# EAGLE board BB_SensorCape (EAGLE 7.2.0)
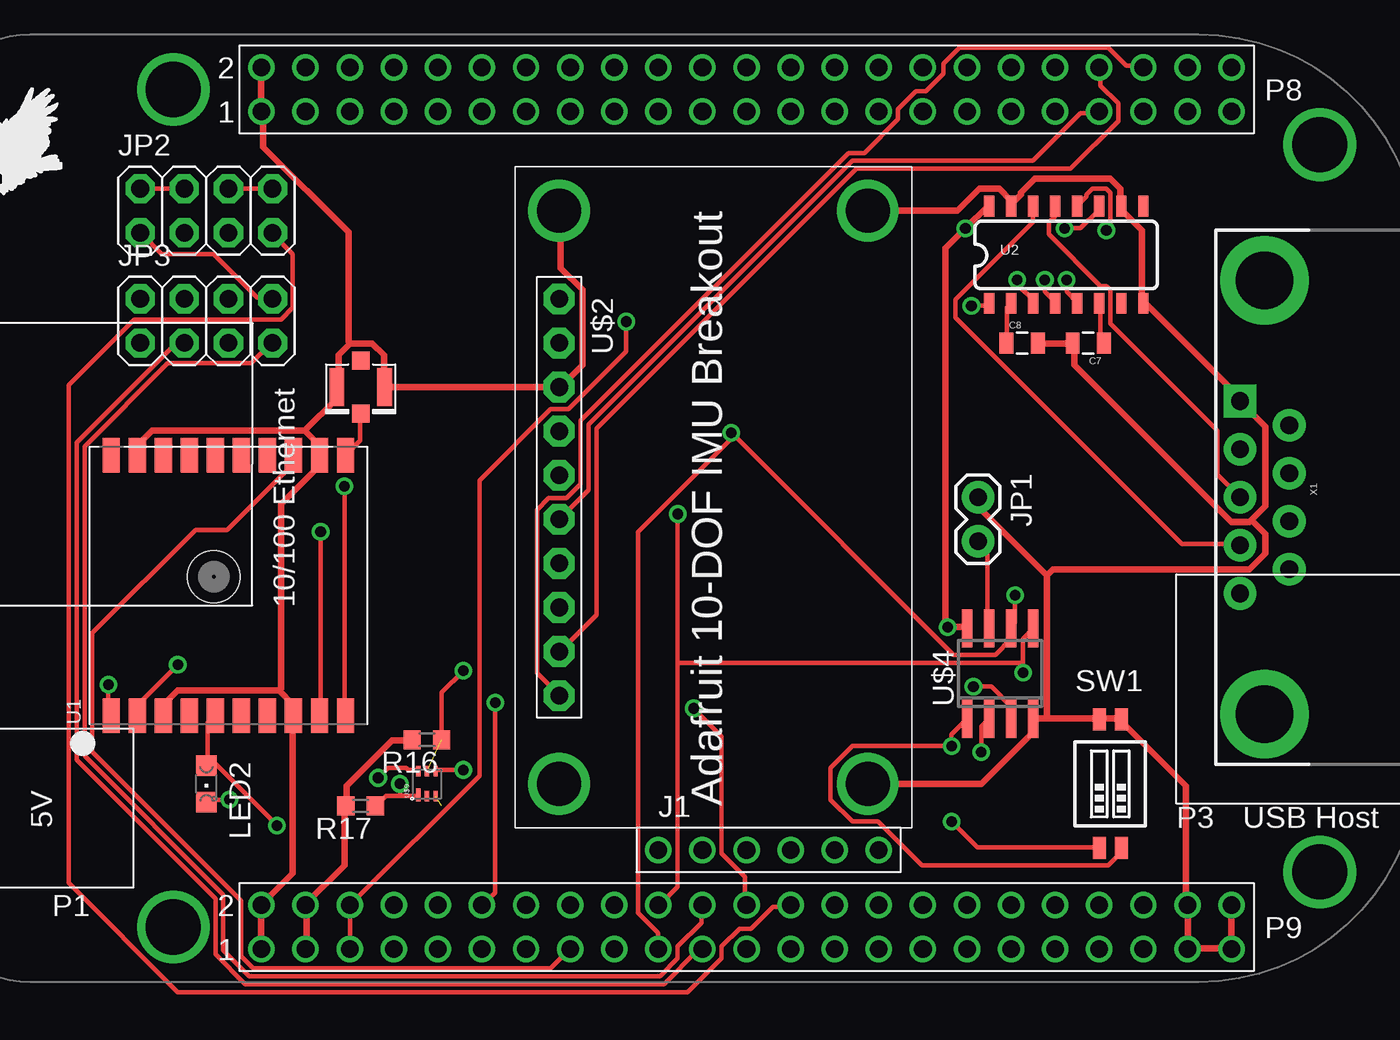
[diagram p0: board, top side]
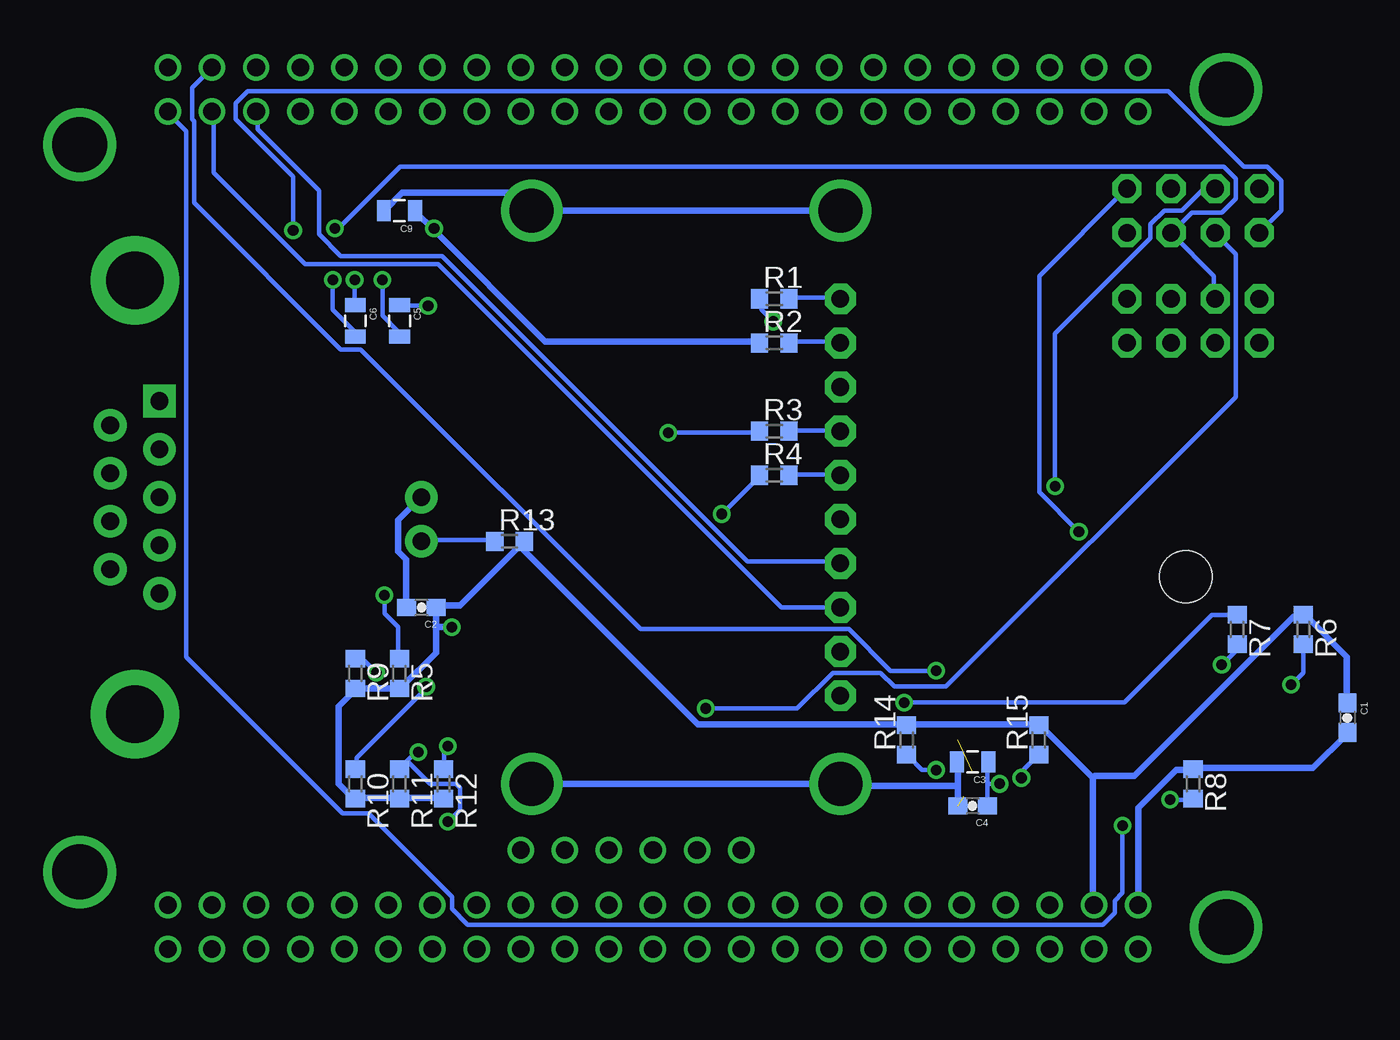
[diagram p1: board, bottom side, seen from below]

No outline drawn. Coordinates in mm, seen from the top.
Copper layers (1*16): Top 0.035mm / dielectric 1.5mm / Bottom 0.035mm
Design rules "default": minimum track width 10mil, minimum drill 24mil, track to track 8mil, track to pad 8mil, pad to pad 8mil, via to via 8mil, smd to smd 8mil, copper to edge 40mil, drill to drill 8mil, minimum pad ring 10mil, minimum via ring 8mil, stop-mask expansion 4mil, vias tented up to drill 0mil, thermal gap 10mil
Net classes: 1 power: width 0.381 mm

## Footprints (pad centres in the part's own frame; a part is rotated, then mirrored left to right if it is on the bottom)
0603-CAP = smd 1.1 x 1: 1 -0.85,0; 2 0.85,0
0805 = smd 0.8 x 1.2: 1 -0.9,0; 2 0.9,0
1X02 = drill 1.016 pad 1.88: 1 0,0; 2 2.54,0
2X04 = drill 1.016 pad 1.676 octagon: 1 -3.81,-1.27; 2 -3.81,1.27; 3 -1.27,-1.27; 4 -1.27,1.27; 5 1.27,-1.27; 6 1.27,1.27; 7 3.81,-1.27; 8 3.81,1.27
CHIPLED_0805 = smd 1.2 x 1.2: A 0,-1.05; C 0,1.05
BEAGLEBONE_BLACK = drill 3.175: H1 14.605,3.175; H2 80.645,6.35; H3 80.645,48.26; H4 14.605,51.435 | drill 1.016: J1.1 42.545,7.62; J1.2 45.085,7.62; J1.3 47.625,7.62; J1.4 50.165,7.62; J1.5 52.705,7.62; J1.6 55.245,7.62; P8.1 19.685,50.165; P8.2 19.685,52.705; P8.3 22.225,50.165; P8.4 22.225,52.705; P8.5 24.765,50.165; P8.6 24.765,52.705; P8.7 27.305,50.165; P8.8 27.305,52.705; P8.9 29.845,50.165; P8.10 29.845,52.705; P8.11 32.385,50.165; P8.12 32.385,52.705; P8.13 34.925,50.165; P8.14 34.925,52.705; P8.15 37.465,50.165; P8.16 37.465,52.705; P8.17 40.005,50.165; P8.18 40.005,52.705; P8.19 42.545,50.165; P8.20 42.545,52.705; P8.21 45.085,50.165; P8.22 45.085,52.705; P8.23 47.625,50.165; P8.24 47.625,52.705; P8.25 50.165,50.165; P8.26 50.165,52.705; P8.27 52.705,50.165; P8.28 52.705,52.705; P8.29 55.245,50.165; P8.30 55.245,52.705; P8.31 57.785,50.165; P8.32 57.785,52.705; P8.33 60.325,50.165; P8.34 60.325,52.705; P8.35 62.865,50.165; P8.36 62.865,52.705; P8.37 65.405,50.165; P8.38 65.405,52.705; P8.39 67.945,50.165; P8.40 67.945,52.705; P8.41 70.485,50.165; P8.42 70.485,52.705; P8.43 73.025,50.165; P8.44 73.025,52.705; P8.45 75.565,50.165; P8.46 75.565,52.705; P9.1 19.685,1.905; P9.2 19.685,4.445; P9.3 22.225,1.905; P9.4 22.225,4.445; P9.5 24.765,1.905; P9.6 24.765,4.445; P9.7 27.305,1.905; P9.8 27.305,4.445; P9.9 29.845,1.905; P9.10 29.845,4.445; P9.11 32.385,1.905; P9.12 32.385,4.445; P9.13 34.925,1.905; P9.14 34.925,4.445; P9.15 37.465,1.905; P9.16 37.465,4.445; P9.17 40.005,1.905; P9.18 40.005,4.445; P9.19 42.545,1.905; P9.20 42.545,4.445; P9.21 45.085,1.905; P9.22 45.085,4.445; P9.23 47.625,1.905; P9.24 47.625,4.445; P9.25 50.165,1.905; P9.26 50.165,4.445; P9.27 52.705,1.905; P9.28 52.705,4.445; P9.29 55.245,1.905; P9.30 55.245,4.445; P9.31 57.785,1.905; P9.32 57.785,4.445; P9.33 60.325,1.905; P9.34 60.325,4.445; P9.35 62.865,1.905; P9.36 62.865,4.445; P9.37 65.405,1.905; P9.38 65.405,4.445; P9.39 67.945,1.905; P9.40 67.945,4.445; P9.41 70.485,1.905; P9.42 70.485,4.445; P9.43 73.025,1.905; P9.44 73.025,4.445; P9.45 75.565,1.905; P9.46 75.565,4.445
R0603 = smd 1 x 1.1: 1 -0.85,0; 2 0.85,0
DIPSWITCH-02-50MIL = smd 0.762 x 1.27: 1 -0.635,-3.7; 2 0.635,-3.7; 3 0.635,3.7; 4 -0.635,3.7
FGPMMOPA6H = smd 2 x 1: P$1 -7.5,6.75; P$2 -7.5,5.25; P$3 -7.5,3.75; P$4 -7.5,2.25; P$5 -7.5,0.75; P$6 -7.5,-0.75; P$7 -7.5,-2.25; P$8 -7.5,-3.75; P$9 -7.5,-5.25; P$10 -7.5,-6.75; P$11 7.5,-6.75; P$12 7.5,-5.25; P$13 7.5,-3.75; P$14 7.5,-2.25; P$15 7.5,-0.75; P$16 7.5,0.75; P$17 7.5,2.25; P$18 7.5,3.75; P$19 7.5,5.25; P$20 7.5,6.75 | hole 3: 0.5,0.85
SO016 = smd 0.6 x 1.2: 1 -4.445,-2.8; 2 -3.175,-2.8; 3 -1.905,-2.8; 4 -0.635,-2.8; 5 0.635,-2.8; 6 1.905,-2.8; 7 3.175,-2.8; 8 4.445,-2.8; 9 4.445,2.8; 10 3.175,2.8; 11 1.905,2.8; 12 0.635,2.8; 13 -0.635,2.8; 14 -1.905,2.8; 15 -3.175,2.8; 16 -4.445,2.8
1X10-BIG = drill 1.016 pad 1.778 octagon: 1 -11.43,0; 2 -8.89,0; 3 -6.35,0; 4 -3.81,0; 5 -1.27,0; 6 1.27,0; 7 3.81,0; 8 6.35,0; 9 8.89,0; 10 11.43,0
SO08 = smd 0.6 x 2.2: 1 -1.905,-2.6; 2 -0.635,-2.6; 3 0.635,-2.6; 4 1.905,-2.6; 5 1.905,2.6; 6 0.635,2.6; 7 -0.635,2.6; 8 -1.905,2.6
ODFN-LD-6 = smd 0.75 x 0.25: 1 -0.645,0.5 | smd 0.6 x 0.25: 2 -0.72,0; 3 -0.72,-0.5; 4 0.72,-0.5; 5 0.72,0; 6 0.72,0.5
U.FL = smd 2.2 x 0.85: P$1 0,1.375; P$2 0,-1.375 | smd 1.05 x 1: P$3 1.525,0; P$4 -1.525,0
DB9_MALE = drill 1.016 pad 1.88: 1 5.54,-1.42; 2 2.77,-1.42; 3 0,-1.42; 4 -2.77,-1.42; 6 4.15,1.42; 7 1.38,1.42; 8 -1.38,1.42; 9 -4.15,1.42 | drill 1.016 pad 1.88 square: 5 -5.54,-1.42 | drill 3.302 pad 5.08: G1 -12.5,0; G2 12.5,0

## Placement (x,y rotation side)
C1  0.1uF  [0603-CAP]  7.62,15.24 270 bottom
C2  0.1uF  [0603-CAP]  60.96,21.59 180 bottom
C3  1uF  [0805]  29.21,12.7 180 bottom
C4  0.1uF  [0603-CAP]  29.21,10.16 180 bottom
C5  0.1 uF  [0805]  62.23,38.1 270 bottom
C6  0.1 uF  [0805]  64.77,38.1 270 bottom
C7  0.1 uF  [0805]  67.31,36.83 180 top
C8  0.1 uF  [0805]  63.5,36.83 0 top
C9  0.1 uF  [0805]  62.23,44.45 180 bottom
JP1  M02PTH  [1X02]  60.96,27.94 270 top
JP2  [2X04]  16.51,44.45 0 top
JP3  [2X04]  16.51,38.1 0 top
LED2  [CHIPLED_0805]  16.51,11.43 180 top
PCB1  BEAGLEBONE_BLACK  [BEAGLEBONE_BLACK]  0,0 0 top
R1  0  [R0603]  40.64,39.37 0 bottom
R2  0  [R0603]  40.64,36.83 0 bottom
R3  0  [R0603]  40.64,31.75 0 bottom
R4  0  [R0603]  40.64,29.21 0 bottom
R5  5.6K  [R0603]  62.23,17.78 270 bottom
R6  0  [R0603]  10.16,20.32 270 bottom
R7  0  [R0603]  13.97,20.32 270 bottom
R8  1K  [R0603]  16.51,11.43 270 bottom
R9  5.6K  [R0603]  64.77,17.78 270 bottom
R10  4.75K  [R0603]  64.77,11.43 270 bottom
R11  4.75K  [R0603]  62.23,11.43 270 bottom
R12  4.75K  [R0603]  59.69,11.43 270 bottom
R13  10K  [R0603]  55.88,25.4 0 bottom
R14  5.6K  [R0603]  33.02,13.97 90 bottom
R15  5.6K  [R0603]  25.4,13.97 90 bottom
R16  10K  [R0603]  29.21,13.97 180 top
R17  100  [R0603]  25.4,10.16 180 top
SW1  [DIPSWITCH-02-50MIL]  68.58,11.43 0 top
U1  FGPMMOPA6H  [FGPMMOPA6H]  17.78,22.86 90 top
U2  MAX232SOIC16  [SO016]  66.04,41.91 0 top
U$2  PINHD-1X10  [1X10-BIG]  36.83,27.94 270 top
U$4  CAT24C256W  [SO08]  62.23,17.78 0 top
U$9  ISL29125  [ODFN-LD-6]  29.21,11.43 90 top
U$20  U.FL  [U.FL]  25.4,34.29 270 top
X1  [DB9_MALE]  77.47,27.94 270 top

## Library data of the parts
C1 C2 C4 = SparkFun-Capacitors; PROD_ID: CAP-08604
C3 C5-C9 = SparkFun-Capacitors
JP1 X1 = SparkFun-Connectors
JP2 JP3 LED2 U$2 = adafruit
PCB1 = e14_BeagleBoneBlack_RevA
R1-R17 = resistor
SW1 = SparkFun-Electromechanical
U1 U$20 = microbuilder
U2 = SparkFun-DigitalIC
U$4 = vttay03_custom
U$9 = SparkFun-Sensors

## Nets
1PPS: PCB1.P9.15 U1.P$13
3.3V [power]: C1.1 C2.1 C9.1 PCB1.P9.3 PCB1.P9.4 R2.1 R5.2 R6.1 R9.2 R10.2 R11.2 R12.2 R13.2 R14.2 R15.2 R16.2 R17.2 U2.16 U$4.8
5V: PCB1.P9.5 PCB1.P9.6 R1.1
BB_GPS_RX: JP2.7 PCB1.P9.26
BB_GPS_TX: JP2.3 PCB1.P9.24
DBG_RX: JP3.7 PCB1.P9.22
DBG_TX: JP3.3 PCB1.P9.21
GND [power]: C1.2 C2.2 C3.2 C4.2 C7.2 C8.2 C9.2 JP1.1 PCB1.P8.1 PCB1.P8.2 PCB1.P9.1 PCB1.P9.2 PCB1.P9.43 PCB1.P9.44 PCB1.P9.45 PCB1.P9.46 R8.1 SW1.3 SW1.4 U1.P$3 U1.P$8 U1.P$12 U1.P$19 U2.8 U2.10 U2.15 U$2.3 U$4.4 U$9.3 U$20.P$1 U$20.P$2 X1.5
GPS_FIX: LED2.A PCB1.P8.45 U1.P$5
GPS_NRESET: PCB1.P9.12 R7.1
GPS_RX: JP2.2 JP2.4 U1.P$10
GPS_TX: JP2.6 JP2.8 U1.P$9
GYR_INT: PCB1.P8.39 U$2.6
GYR_RDY: PCB1.P8.41 U$2.7
I2C2_SCL: PCB1.P9.19 R3.1 R5.1 U$4.6
I2C2_SDA: PCB1.P9.20 R4.1 R9.1 U$4.5
ISL29125_INT: PCB1.P8.44 R16.1 U$9.5
LSM_DRDY: PCB1.P8.42 U$2.10
LSM_INT1: PCB1.P8.43 U$2.8
LSM_INT2: PCB1.P8.40 U$2.9
N$1: R1.2 U$2.1
N$2: R2.2 U$2.2
N$3: R4.2 U$2.5
N$4: R3.2 U$2.4
N$5: LED2.C R8.2
N$6: R6.2 U1.P$1
N$7: U1.P$11 U$20.P$3
N$8: R7.2 U1.P$2
N$9: R12.1 SW1.2 U$4.1
N$10: C7.1 U2.6
N$11: R11.1 SW1.1 U$4.2
N$12: R10.1 U$4.3
N$13: JP1.2 R13.1 U$4.7
N$14: C5.2 U2.3
N$15: R14.1 U$9.4
N$16: R15.1 U$9.6
N$18: C3.1 C4.1 R17.1 U$9.1
N$23: C8.1 U2.2
N$24: C5.1 U2.1
N$27: C6.1 U2.4
N$28: C6.2 U2.5
RXD: JP2.1 JP3.8 U2.12
RXD#: U2.13 X1.3
TXD: JP2.5 JP3.4 U2.11
TXD#: U2.14 X1.2

## Tracks (layer width: path | path; a pad name or v marks a point on that pad's centre or on a via)
1PPS
  Top 0.254: U1.P$13 21.49,30.29 21.49,29.83 17.72,26.06 15.89,26.06 9.94,20.12 9.94,13.26 18.52,4.69 18.52,1.49 19.2,0.8 36.35,0.8 37.38,1.83 PCB1.P9.15
3.3V  (via drill 0.61)
  Top 0.381: R16.2 28.35,13.95 27.2,13.95 24.57,11.32 24.57,10.17 R17.2 24.46,10.06 24.46,6.74 22.29,4.57 PCB1.P9.4 22.29,4.34 22.29,1.94 PCB1.P9.3 | U$4.8 60.24,20.46 v59.21,20.46 59.09,20.57 59.09,42.29 v60.24,43.43 61.49,44.69 U2.16
  Bottom 0.381: C1.1 7.66,16.12 7.66,18.75 10.06,21.14 R6.1 10.29,21.03 10.74,21.03 19.89,11.89 22.17,11.89 22.29,11.77 | 22.29,11.77 25.26,14.74 R15.2 25.49,14.86 32.92,14.86 R14.2 33.15,14.86 45.03,14.86 55.21,25.03 R13.2 55.09,25.38 58.75,21.72 60.01,21.72 C2.1 60.12,21.49 60.12,20.46 | 22.29,11.77 22.29,4.46 PCB1.P9.4 | R12.2 59.78,10.63 62.18,10.63 R11.2 62.41,10.63 64.69,10.63 R10.2 64.92,10.63 65.72,11.43 65.72,15.89 64.81,16.8 R9.2 64.69,16.92 62.29,16.92 R5.2 62.06,17.03 60.12,18.97 60.12,20.46 | 60.12,20.46 v59.21,20.46 | 60.29,43.38 61.27,44.35 C9.1 | 60.29,43.38 53.84,36.92 41.49,36.92 R2.1 | v60.24,43.43 60.29,43.38
5V  (via drill 0.61)
  Top 0.254: v40.69,38.06 40.69,36.35 37.38,33.03 36.35,33.03 32.23,28.92 32.23,11.89 24.8,4.46 PCB1.P9.6 24.8,4.34 24.8,1.94 PCB1.P9.5
  Bottom 0.254: v40.69,38.06 41.38,38.75 41.38,39.32 R1.1
BB_GPS_RX
  Top 0.254: PCB1.P9.26 50.06,4.34 49.15,4.34 47.89,3.09 47.21,3.09 46.18,2.06 46.18,1.37 44.23,-0.57 14.86,-0.57 8.57,5.71 8.57,34.4 12.34,38.18 20.8,38.18 21.49,38.86 21.49,41.95 20.34,43.09 JP2.7
BB_GPS_TX  (via drill 0.61)
  Top 0.254: v44.58,15.77 46.18,14.17 46.18,7.43 47.55,6.06 47.55,4.46 PCB1.P9.24
  Bottom 0.254: v44.58,15.77 39.32,15.77 37.26,17.83 34.52,17.83 33.72,17.03 30.75,17.03 14.06,33.72 14.06,41.95 15.2,43.09 JP2.3
DBG_RX
  Top 0.254: PCB1.P9.22 45.03,4.34 45.03,3.43 43.66,2.06 43.66,1.37 42.63,0.34 18.97,0.34 17.49,1.83 17.49,5.03 9.49,13.03 9.49,30.86 14.29,35.66 19.09,35.66 20.23,36.8 JP3.7
DBG_TX
  Top 0.254: PCB1.P9.21 45.03,1.83 44.81,1.83 42.86,-0.11 18.75,-0.11 17.03,1.6 17.03,4.8 9.03,12.8 9.03,31.09 14.74,36.8 15.2,36.8 JP3.3
GND  (via drill 2.54)  (1 unrouted)
  Top 0.381: 20.69,16.8 14.86,16.8 14.06,16 14.06,15.43 U1.P$3 | 20.69,16.8 21.49,16 21.49,15.43 U1.P$8 21.49,15.2 21.49,6.29 19.77,4.57 PCB1.P9.2 19.66,4.34 19.66,1.94 PCB1.P9.1 | v36.83,44.45 36.92,44.35 36.92,41.15 38.18,39.89 38.18,35.55 36.92,34.29 U$2.3 U$20.P$1 26.75,34.29 26.75,36.12 26.06,36.8 24.8,36.8 | PCB1.P8.2 19.66,52.69 19.66,50.18 PCB1.P8.1 19.77,50.06 19.77,48.12 24.69,43.2 24.69,36.92 24.8,36.8 | 22.17,31.77 13.37,31.77 12.57,30.98 12.57,30.4 U1.P$19 | 22.17,31.77 22.97,30.98 22.97,30.4 U1.P$12 22.97,30.18 22.97,29.72 20.8,27.55 20.8,16.92 20.69,16.8 | 22.17,31.77 24,33.6 24,34.29 U$20.P$2 24.12,34.4 24.12,36.12 24.8,36.8 | v54.61,44.45 54.63,44.46 59.78,44.46 61.04,45.72 62.18,45.72 62.87,45.03 U2.15 62.87,44.81 63.44,45.38 63.44,45.49 64.24,46.29 68.58,46.29 69.15,45.72 69.15,44.81 U2.10 69.15,44.58 70.41,43.32 70.41,39.2 U2.8 70.64,39.09 76.12,33.6 X1.5 76.12,33.38 77.5,32 77.5,27.43 76.69,26.63 | C8.2 64.47,36.8 66.41,36.8 C7.2 66.52,36.69 66.52,35.55 75.55,26.52 76.58,26.52 76.69,26.63 | PCB1.P9.46 75.55,4.34 75.55,2.06 PCB1.P9.45 75.55,1.94 73.15,1.94 PCB1.P9.43 73.04,1.94 73.04,4.34 PCB1.P9.44 72.92,4.57 72.92,11.32 69.27,14.97 SW1.3 69.15,15.2 68.01,15.2 SW1.4 67.78,15.2 64.92,15.2 | 64.92,15.2 64.24,15.2 U$4.4 64.01,15.09 64.01,14.29 61.15,11.43 v54.61,11.43 | 64.92,23.43 61.04,27.32 61.04,27.89 JP1.1 | 64.92,15.2 64.92,23.43 | 76.69,26.63 77.5,25.83 77.5,24.69 76.58,23.77 65.27,23.77 64.92,23.43
  Bottom 0.381: C1.2 7.66,14.29 9.6,12.34 16.46,12.34 R8.1 16.69,12.23 17.49,12.23 19.66,10.06 19.66,4.46 PCB1.P9.2 | C9.2 63.09,44.46 62.06,45.49 55.66,45.49 54.63,44.46 v54.61,44.45 54.52,44.46 36.92,44.46 v36.83,44.45 | C2.2 61.84,21.6 61.84,24.35 62.29,24.8 62.29,26.63 61.04,27.89 JP1.1 | 30.06,11.32 30.06,12.69 C3.2 | 30.06,11.32 30.06,10.17 C4.2 | 30.06,11.32 36.69,11.32 36.8,11.43 v36.83,11.43 v54.61,11.43
GPS_FIX  (via drill 0.61)
  Top 0.254: U1.P$5 16.92,15.32 16.57,14.97 16.57,12.57 LED2.A 16.69,12.57 17.03,12.57 v20.57,9.03
  Bottom 0.254: v20.57,9.03 20.57,5.14 21.03,4.69 21.03,4 21.72,3.31 58.29,3.31 59.21,4.23 59.21,4.92 64.01,9.72 65.49,9.72 74.52,18.75 74.52,49.03 75.55,50.06 PCB1.P8.45
GPS_NRESET  (via drill 0.61)
  Top 0.254: v33.15,16.12 33.15,5.14 32.46,4.46 PCB1.P9.12
  Bottom 0.254: v33.15,16.12 20.46,16.12 15.43,21.14 14.06,21.14 R7.1
GPS_RX  (via drill 0.61)
  Top 0.254: v24.46,28.57 24.46,15.43 U1.P$10 | JP2.4 JP2.2
  Bottom 0.254: v24.46,28.57 24.46,37.38 18.97,42.86 18.97,43.66 18.17,44.46 17.14,44.46 15.89,45.72 JP2.4
GPS_TX  (via drill 0.61)
  Top 0.254: v23.09,25.95 23.09,15.43 U1.P$9 | JP2.8 JP2.6
  Bottom 0.254: v23.09,25.95 25.38,28.23 25.38,40.69 20.34,45.72 JP2.8
GYR_INT
  Top 0.254: PCB1.P8.39 67.89,50.06 66.86,50.06 64.12,47.32 53.72,47.32 38.52,32.12 38.52,28.35 36.92,26.75 U$2.6
GYR_RDY
  Bottom 0.254: PCB1.P8.41 70.41,50.06 70.41,49.15 66.86,45.61 66.86,43.09 65.61,41.83 59.78,41.83 42.18,24.23 36.92,24.23 U$2.7
I2C2_SCL  (via drill 0.61)
  Top 0.254: v63.09,22.29 63.09,20.69 62.87,20.46 U$4.6 62.87,19.77 61.95,18.86 59.55,18.86 v46.75,31.66 46.86,31.43 41.38,25.95 41.38,4 42.52,2.86 42.52,1.94 PCB1.P9.19
  Bottom 0.254: v46.75,31.66 41.49,31.66 R3.1 | v63.09,22.29 63.09,21.26 62.29,20.46 62.29,18.63 R5.1
I2C2_SDA  (via drill 0.61)
  Top 0.254: 63.55,18.4 63.55,19.77 64.12,20.34 U$4.5 | 63.55,18.4 v63.55,17.83 | 43.66,18.4 43.66,5.49 42.63,4.46 PCB1.P9.20 | 43.66,18.4 v43.66,26.98 | 43.66,18.4 63.55,18.4
  Bottom 0.254: v63.55,17.83 64.24,18.52 64.69,18.52 R9.1 | v43.66,26.98 41.49,29.15 R4.1
ISL29125_INT  (via drill 0.61)  (1 unrouted)
  Top 0.254: v31.32,17.95 30.06,16.69 30.06,14.06 R16.1
  Bottom 0.254: v31.32,17.95 33.95,17.95 36.35,20.34 48.35,20.34 64.47,36.46 65.61,36.46 74.07,44.92 74.07,49.61 74.18,49.72 74.18,51.55 PCB1.P8.44
LSM_DRDY
  Top 0.254: PCB1.P8.42 70.41,52.81 69.49,52.81 68.47,53.84 59.89,53.84 58.98,52.92 58.98,52.35 57.95,51.32 57.38,51.32 56.35,50.29 56.35,49.72 54.41,47.78 53.49,47.78 38.06,32.35 38.06,28.69 37.26,27.89 36.23,27.89 35.55,27.2 35.55,17.83 36.8,16.57 U$2.10
LSM_INT1
  Bottom 0.254: PCB1.P8.43 72.92,50.06 72.92,46.63 67.67,41.38 60.01,41.38 40.23,21.6 36.92,21.6 U$2.8
LSM_INT2
  Top 0.254: PCB1.P8.40 68.01,52.69 68.01,51.66 69.04,50.63 69.04,49.61 66.29,46.86 53.95,46.86 38.98,31.89 38.98,21.14 36.92,19.09 U$2.9
N$1
  Bottom 0.254: R1.2 39.78,39.43 36.92,39.43 U$2.1
N$2
  Bottom 0.254: R2.2 39.78,36.92 36.92,36.92 U$2.2
N$3
  Bottom 0.254: R4.2 39.78,29.26 36.92,29.26 U$2.5
N$4
  Bottom 0.254: R3.2 39.78,31.77 36.92,31.77 U$2.4
N$5  (via drill 0.61)
  Top 0.254: v17.83,10.52 16.69,10.52 16.57,10.4 LED2.C
  Bottom 0.254: v17.83,10.52 16.57,10.52 R8.2
N$6  (via drill 0.61)
  Top 0.254: v10.86,17.14 10.86,15.54 10.97,15.43 U1.P$1
  Bottom 0.254: v10.86,17.14 10.17,17.83 10.17,19.43 R6.2
N$7
  Top 0.254: U$20.P$3 25.38,32.69 25.38,31.2 24.57,30.4 U1.P$11
N$8  (via drill 0.61)
  Top 0.254: v14.86,18.29 12.57,16 12.57,15.43 U1.P$2
  Bottom 0.254: v14.86,18.29 14.06,19.09 14.06,19.43 R7.2
N$9  (via drill 0.61)
  Top 0.254: U$4.1 60.24,15.09 59.44,14.29 v59.44,13.6 53.72,13.6 52.46,12.34 52.46,10.52 53.72,9.26 55.21,9.26 57.72,6.74 68.47,6.74 69.15,7.43 69.15,7.66 SW1.2
  Bottom 0.254: v59.44,13.6 59.66,13.37 59.66,12.34 R12.1
N$10
  Top 0.254: U2.6 68.01,39.09 68.01,37.03 68.12,36.92 C7.1
N$11  (via drill 0.61)
  Top 0.254: v61.15,13.26 61.15,14.74 61.49,15.09 U$4.2 | v59.44,9.26 60.92,7.77 67.89,7.77 SW1.1
  Bottom 0.254: v61.15,13.26 61.27,13.26 62.18,12.34 R11.1 61.72,12.69 60.47,11.43 58.98,11.43 58.75,11.2 58.75,9.94 v59.44,9.26
N$12  (via drill 0.61)
  Top 0.254: v60.69,17.03 61.72,17.03 62.87,15.89 U$4.3
  Bottom 0.254: v60.69,17.03 60.69,16.92 64.69,12.92 64.69,12.34 R10.1
N$13
  Top 0.254: U$4.7 61.49,20.46 61.49,24.92 61.04,25.38 JP1.2
  Bottom 0.254: R13.1 56.81,25.49 60.92,25.49 JP1.2
N$14  (via drill 0.61)
  Top 0.254: v63.21,40.46 63.21,40.23 64.24,39.2 U2.3
  Bottom 0.254: v63.21,40.46 63.21,38.41 62.29,37.49 62.29,37.26 C5.2
N$15  (via drill 0.61)
  Top 0.254: v31.32,12.23 29.72,12.23 U$9.4
  Bottom 0.254: v31.32,12.23 32.12,12.23 32.92,13.03 R14.1
N$16  (via drill 0.61)
  Top 0.254: v26.4,11.77 26.98,12.34 28,12.34 28.12,12.23 28.69,12.23 U$9.6
  Bottom 0.254: v26.4,11.77 26.4,12.12 25.49,13.03 R15.1
N$18  (via drill 0.61)
  Top 0.254: 27.66,10.74 26.86,10.74 26.29,10.17 R17.1 | 27.66,10.74 28.69,10.74 U$9.1 | v27.66,11.43 27.66,10.74
  Bottom 0.254: 28.35,11.43 28.35,12.69 C3.1 | 28.35,11.43 28.35,10.17 C4.1 | 28.35,11.43 v27.66,11.43
N$23
  Top 0.254: C8.1 62.64,36.92 62.64,38.86 62.87,39.09 U2.2
N$24  (via drill 0.61)
  Top 0.254: v60.58,38.98 61.38,38.98 61.49,39.09 U2.1
  Bottom 0.254: v60.58,38.98 62.18,38.98 C5.1
N$27  (via drill 0.61)
  Top 0.254: v64.81,40.46 64.81,39.78 65.38,39.2 U2.4
  Bottom 0.254: v64.81,40.46 64.81,39.09 C6.1
N$28  (via drill 0.61)
  Top 0.254: v66.06,40.46 66.06,39.78 66.64,39.2 U2.5
  Bottom 0.254: v66.06,40.46 66.06,38.75 64.81,37.49 64.81,37.26 C6.2
RXD  (via drill 0.61)
  Top 0.254: v68.35,43.32 68.58,43.55 68.58,45.49 68.35,45.72 67.55,45.72 67.21,45.38 67.21,45.26 66.75,44.81 U2.12 | JP3.8 20.23,39.43 19.43,39.43 16.92,41.95 13.95,41.95 12.8,43.09 JP2.1
  Bottom 0.254: v68.35,43.32 68.35,46.41 71.67,49.72 71.67,50.63 70.98,51.32 17.95,51.32 13.6,46.98 12.23,46.98 11.43,46.18 11.43,44.46 12.69,43.2 JP2.1
RXD#
  Top 0.254: U2.13 65.38,44.69 65.38,44.12 65.04,43.78 65.04,43.09 68.01,40.12 68.35,40.12 68.58,39.89 68.58,37.95 74.75,31.77 74.75,29.26 76.01,28 X1.3
TXD  (via drill 0.61)
  Top 0.254: v65.95,43.43 66.86,43.43 67.89,44.46 67.89,44.69 U2.11
  Bottom 0.254: v65.95,43.43 65.72,43.43 62.18,46.98 14.74,46.98 14.06,46.29 14.06,45.15 14.86,44.35 16.57,44.35 17.72,43.2 JP2.5 17.72,43.09 15.32,40.69 15.32,39.43 JP3.4
TXD#
  Top 0.254: U2.14 64.12,44.69 64.12,43.78 59.66,39.32 59.66,38.29 72.69,25.26 76.01,25.26 X1.2

## Text on the board
tNames: Adafruit 10-DOF IMU Breakout